# Altium PCB PCB1.PcbDoc
Units mm, origin at the board's own origin, x right, y up, seen from the top; angles counter-clockwise.
Board outline 30 x 15 mm, 2 copper layers (Top Layer, Bottom Layer); 5 components, 5 nets, 23 pads, 0 vias.
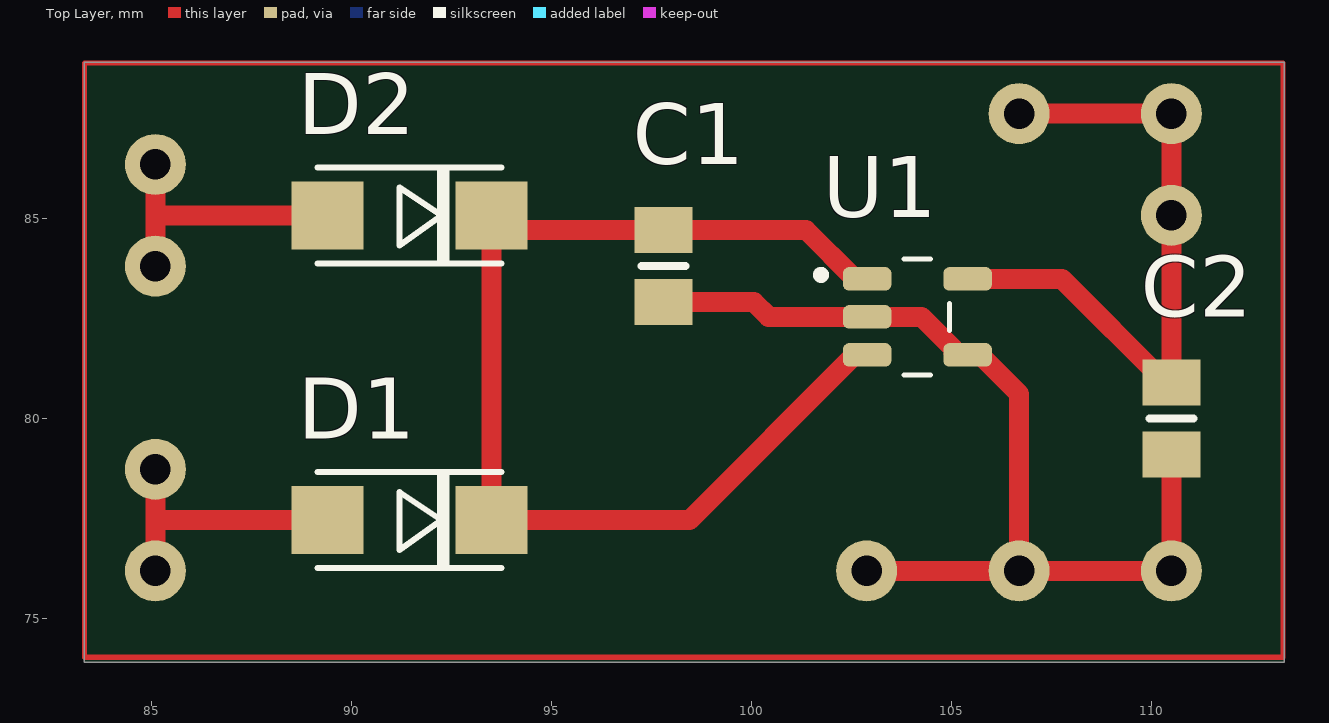
[diagram p0: Top Layer view]
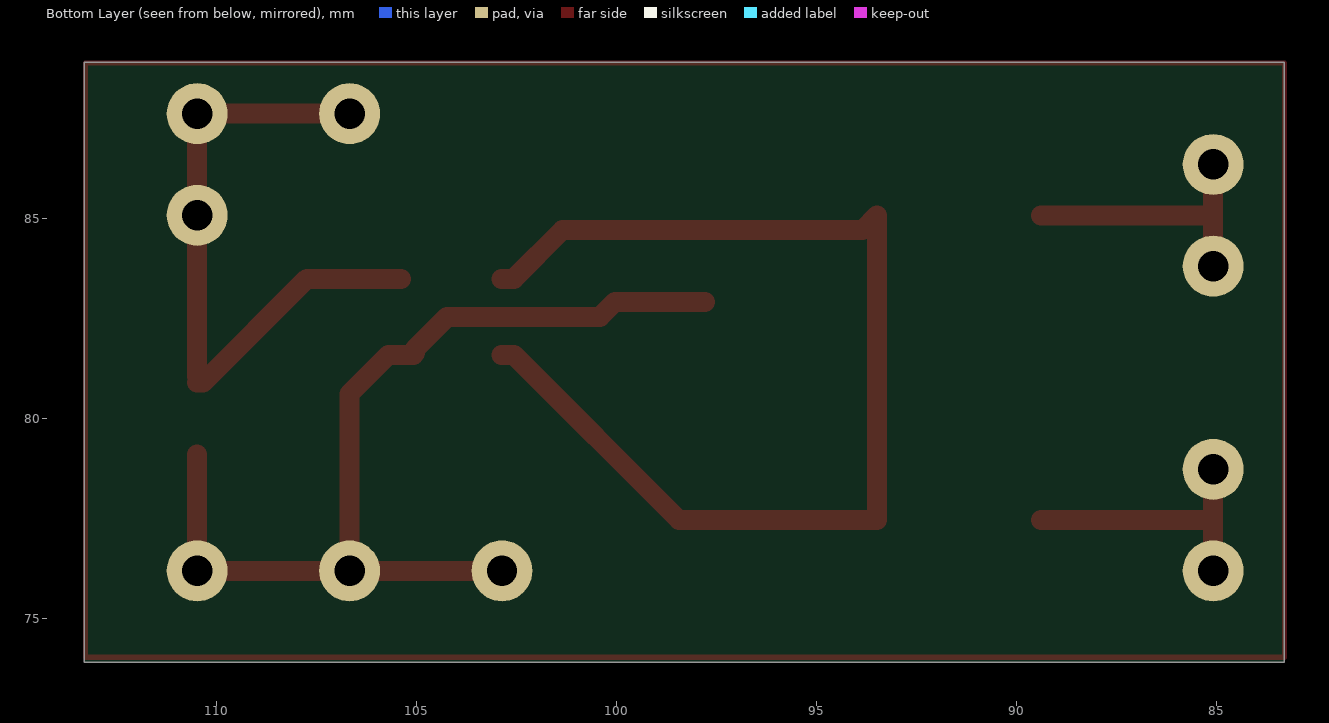
[diagram p1: Bottom Layer view, seen from below]
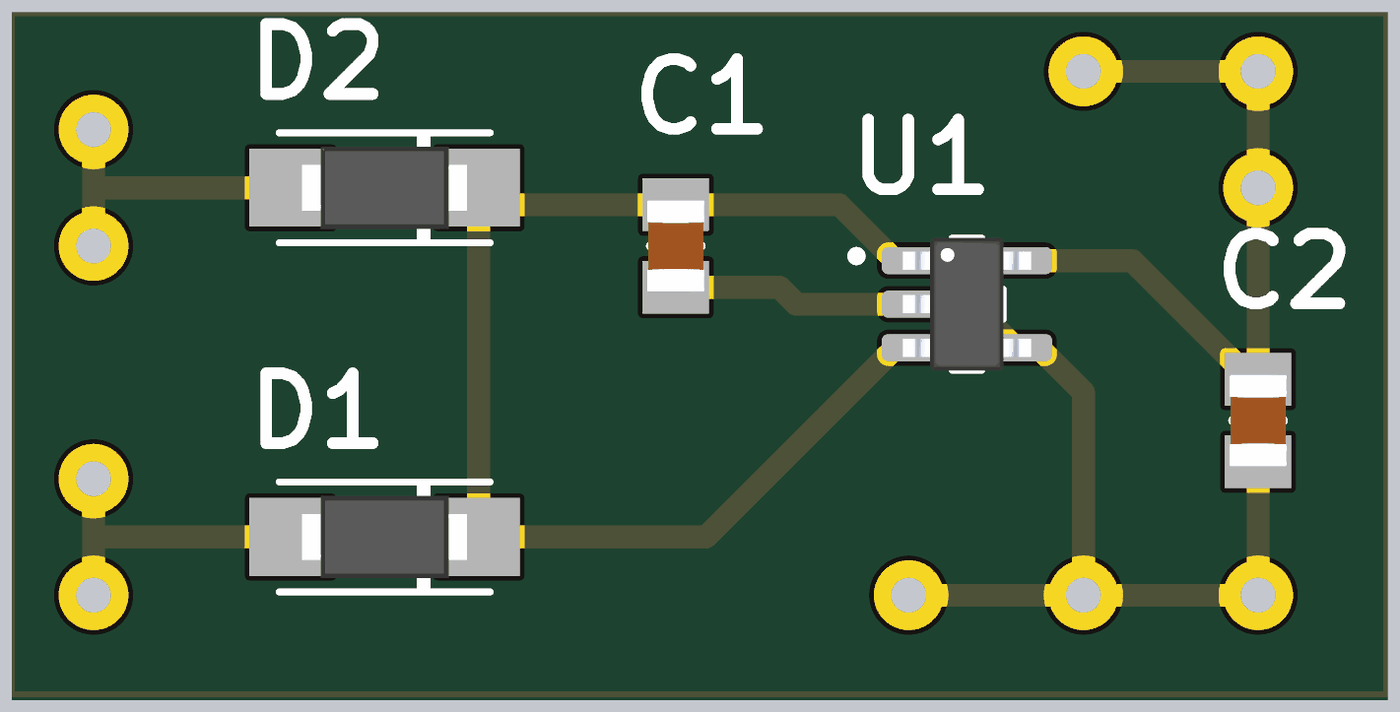
[diagram p2: 3D render of the assembled board from above, using the file's embedded part models]

## Layer stack, top to bottom
Top Solder: solder mask 0.0102, Solder Resist, Dk 3.5
Top Layer: signal copper 0.0356
Dielectric 1: dielectric 0.32, FR-4, Dk 4.8
Bottom Layer: signal copper 0.0356
Bottom Solder: solder mask 0.0102, Solder Resist, Dk 3.5

## Board outline
83.312,73.914 83.312,88.914 113.312,88.914 113.312,73.914

## Design rules (kind name [scope] priority, off if disabled: settings)
Clearance [All] p1: gap=0.254 ignorepadtopadclearanceinfootprint=FALSE
PolygonConnect [All] p1: connectstyle=Relief reliefconductorwidth=0.254 reliefentries=4 polygonreliefangle="90 Angle" airgapwidth=0.254
RoutingVias [All] p1: holewidth=0.711 width=1.27 viastyle="Through Hole" minholewidth=0.711 minwidth=1.27 maxholewidth=0.711 maxwidth=1.27
SolderMaskExpansion [All] p1: expansion=0.102 istentingtop=FALSE
Width [All] p1: maxlimit=1 minlimit=0.254 preferedwidth=0.5 bottomlayer_maxwidth=0.254 bottomlayer_prefwidth=0.254 minimp=50.000000 maximp=50.000000 favimp=50.000000
30 further rules are at their usual default settings.

## Components (designator, comment, footprint, x,y, rotation, side; value= is the part's Value field where it differs from the comment)
C1 "FS051C473K4Z2A" CAPC2012X140N 97.79,83.82 r270 top
C2 "FS051C473K4Z2A" CAPC2012X140N 110.49,80.01 r270 top
D1 "SS14" DO-214AC 91.44,77.47 r180 top
D2 "SS14" DO-214AC 91.44,85.09 r180 top
U1 "TLV73333PDBVR" SOT95P280X145-5N 104.14,82.55 r0 top

## Footprints (in the part's own frame and the unit in brackets; to place one, negate y for a bottom-side part, rotate by r counter-clockwise, add the part's x,y. Pads: shape width x height; smd on the part's side, far side on the other; paste and mask are expansions set on the pad)
CAPC2012X140N [mm]
  rect 1.15x1.45 smd paste+0 mask+0.102: 1(-0.9,0) 2(0.9,0)
  silkscreen extent 0,-0.55 0,0.55, body extent -1,-0.63 1,0.63, height 0.94
DO-214AC [mm]
  rect 1.8x1.7 smd: A(2.05,0) K(-2.05,0)
  silkscreen extent -2.3,-1.2 2.3,1.2, body extent -1.8,-0.9 1.8,0.9, height 1.43
SOT95P280X145-5N [mm]
  rrect50% 1.21x0.59 smd: 1(-1.255,0.95) 2(-1.255,0) 3(-1.255,-0.95) 4(1.255,-0.95) 5(1.255,0.95)
  silkscreen extent -2.51,-1.45 0.8,1.45, body extent -1.4,-1.45 1.4,1.45, height 1.45

## Part data
C1 C2: "Ceramic Capacitor", Package="0805-2 AVX", Check_prices=https://www.snapeda.com/parts/FS051C473K4Z2A/AVX/view-part/?ref=eda, MF=AVX, MP=FS051C473K4Z2A, SnapEDA_Link=https://www.snapeda.com/parts/FS051C473K4Z2A/AVX/view-part/?ref=snap
D1 D2: "Diode Schottky 40 V 1A Surface Mount DO-214AC (SMA)", Package="SMA-2 ON Semiconductor", Check_prices=https://www.snapeda.com/parts/SS14/Onsemi/view-part/?ref=eda, MF=onsemi, MP=SS14, SnapEDA_Link=https://www.snapeda.com/parts/SS14/Onsemi/view-part/?ref=snap
U1: "300-mA, capacitor-free, low-IQ, low-dropout voltage regulator with enable", Package="SOT-23-5 Texas Instruments", Check_prices=https://www.snapeda.com/parts/TLV73333PDBVR/Texas+Instruments/view-part/?ref=eda, MF="Texas Instruments", MP=TLV73333PDBVR, SnapEDA_Link=https://www.snapeda.com/parts/TLV73333PDBVR/Texas+Instruments/view-part/?ref=snap

## Free pads (board coordinates)
  round 1.524 hole 0.762: 68(85.09,76.2) 69(85.09,78.74) 70(85.09,83.82) 71(85.09,86.36) 72(110.49,87.63) 73(110.49,85.09) 74(110.49,76.2) 75(106.68,76.2) 76(102.87,76.2) 77(106.68,87.63)

## Nets (pads, with @x,y where several pads share a name; then routed paths per layer and width w, separated by ;. In a path a pad name is that pad's centre, name@x,y a point inside that pad or via, vN(x,y) a via of type N, cw(c..) or ccw(c..) an arc to the next point about the centre after c; other vN are vias at no path point)
bat: D2.A pad.70 pad.71 | length 6.8
  Top Layer w0.5: pad.70 85.09,85.09 ; pad.71 85.09,85.09 ; D2.A 85.09,85.09
GND: C1.2 C2.2 pad.74 pad.75 pad.76 U1.2 U1.4 | length 24.9
  Top Layer w0.5: C1.2 100.05,82.92 100.42,82.55 U1.2 104.24,82.55 105.04,81.75 105.04,81.645 105.085,81.6 U1.4 105.705,81.6 106.68,80.625 pad.75 ; pad.76 pad.75 ; C2.2 pad.74 pad.75
solar: D1.A pad.68 pad.69 | length 6.8
  Top Layer w0.5: pad.68 85.09,77.47 ; pad.69 85.09,77.47 ; D1.A 85.09,77.47
Vin: C1.1 D1.K D2.K U1.1 U1.3 | length 28.8
  Top Layer w0.5: U1.3 102.575,81.6 98.445,77.47 D1.K D2.K 93.86,84.72 C1.1 101.355,84.72 102.575,83.5 U1.1
Vout: C2.1 pad.72 pad.73 pad.77 U1.5 | length 16.8
  Top Layer w0.5: U1.5 107.75,83.5 C2.1@110.34,80.91 ; pad.77 pad.72 pad.73 110.49,81.06 C2.1@110.34,80.91 ; C2.1 C2.1@110.34,80.91
copper on no net: | length 89.7
  Top Layer w0.127: 83.312,74.041 113.284,74.041 113.284,88.9 83.312,88.9 83.312,74.041